# Altium PCB Device.PcbDoc
Units mil, origin at the board's own origin, x right, y up, seen from the top; angles counter-clockwise.
Board outline 1574.8 x 590.55 mil, 4 copper layers (Top Layer, Sub Top Layer, Sub Bottom Layer, Bottom Layer), stack 23.756 mil thick; 66 components, 66 nets, 317 pads, 27 vias.
Unrouted connection lines stored in the file: 85.
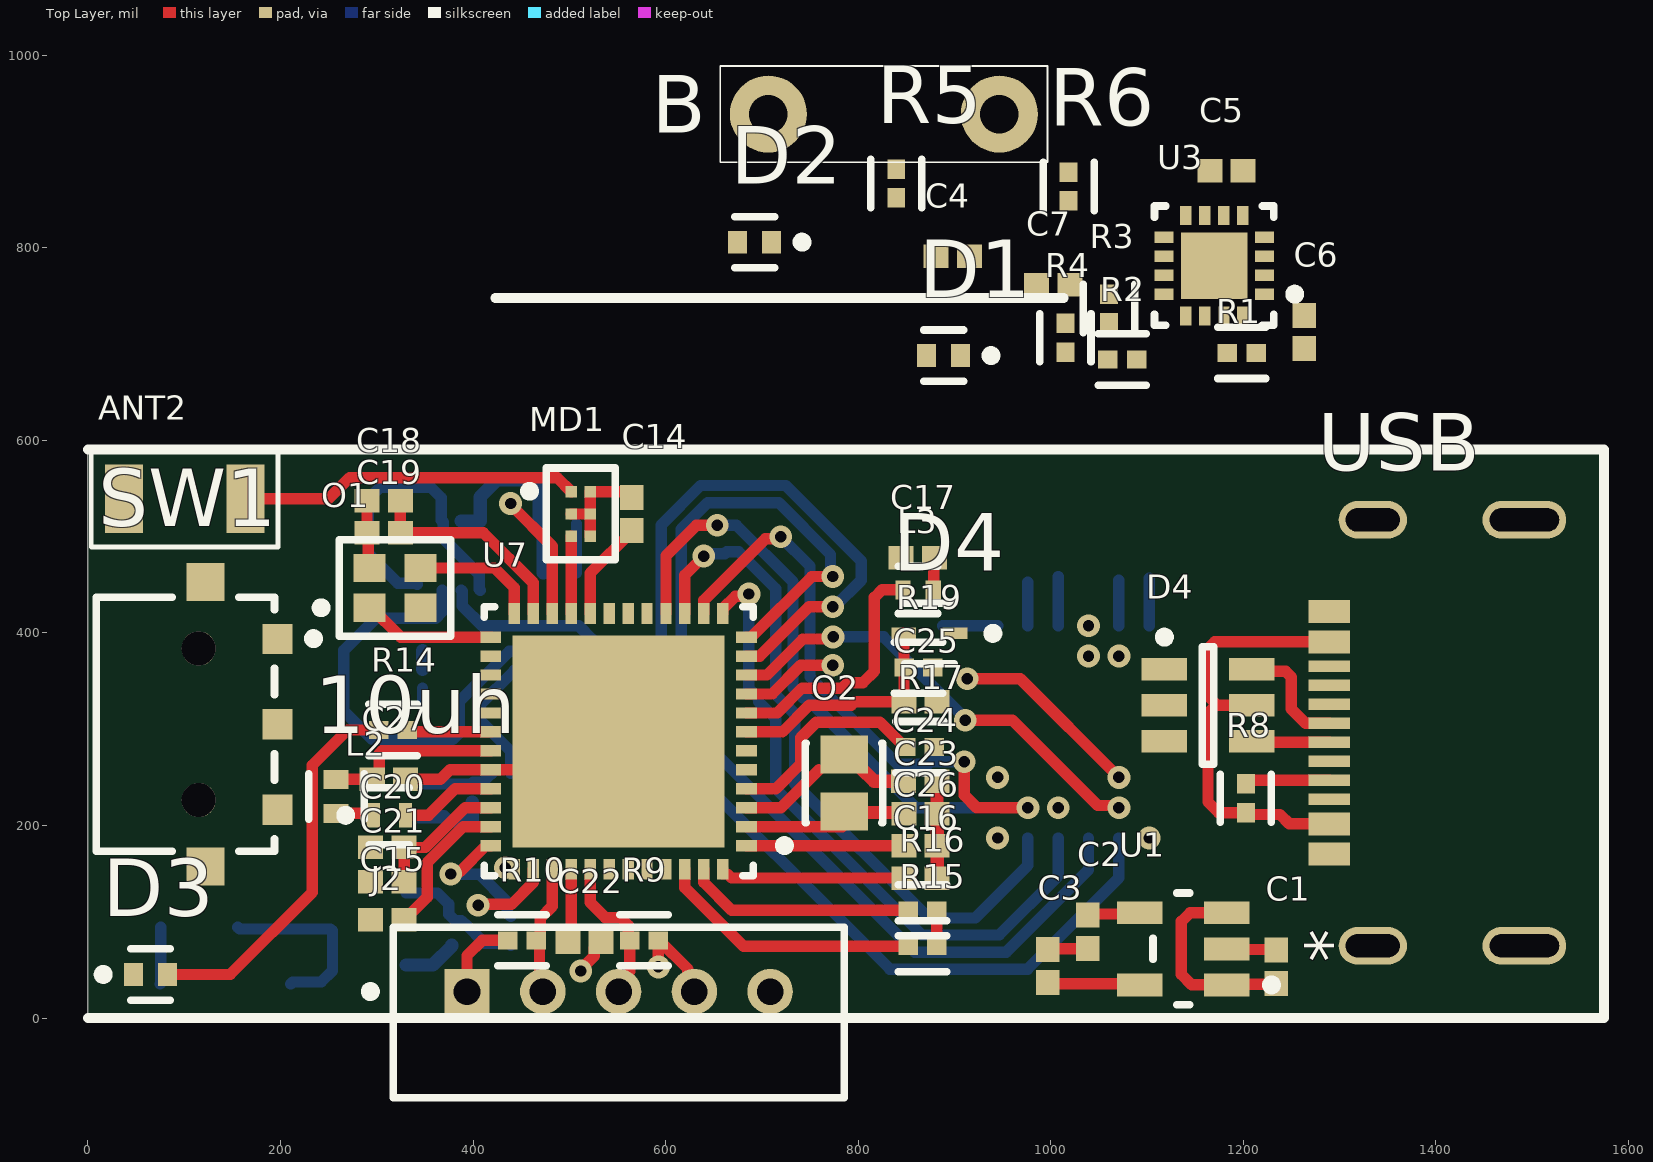
[diagram p0: Top Layer view]
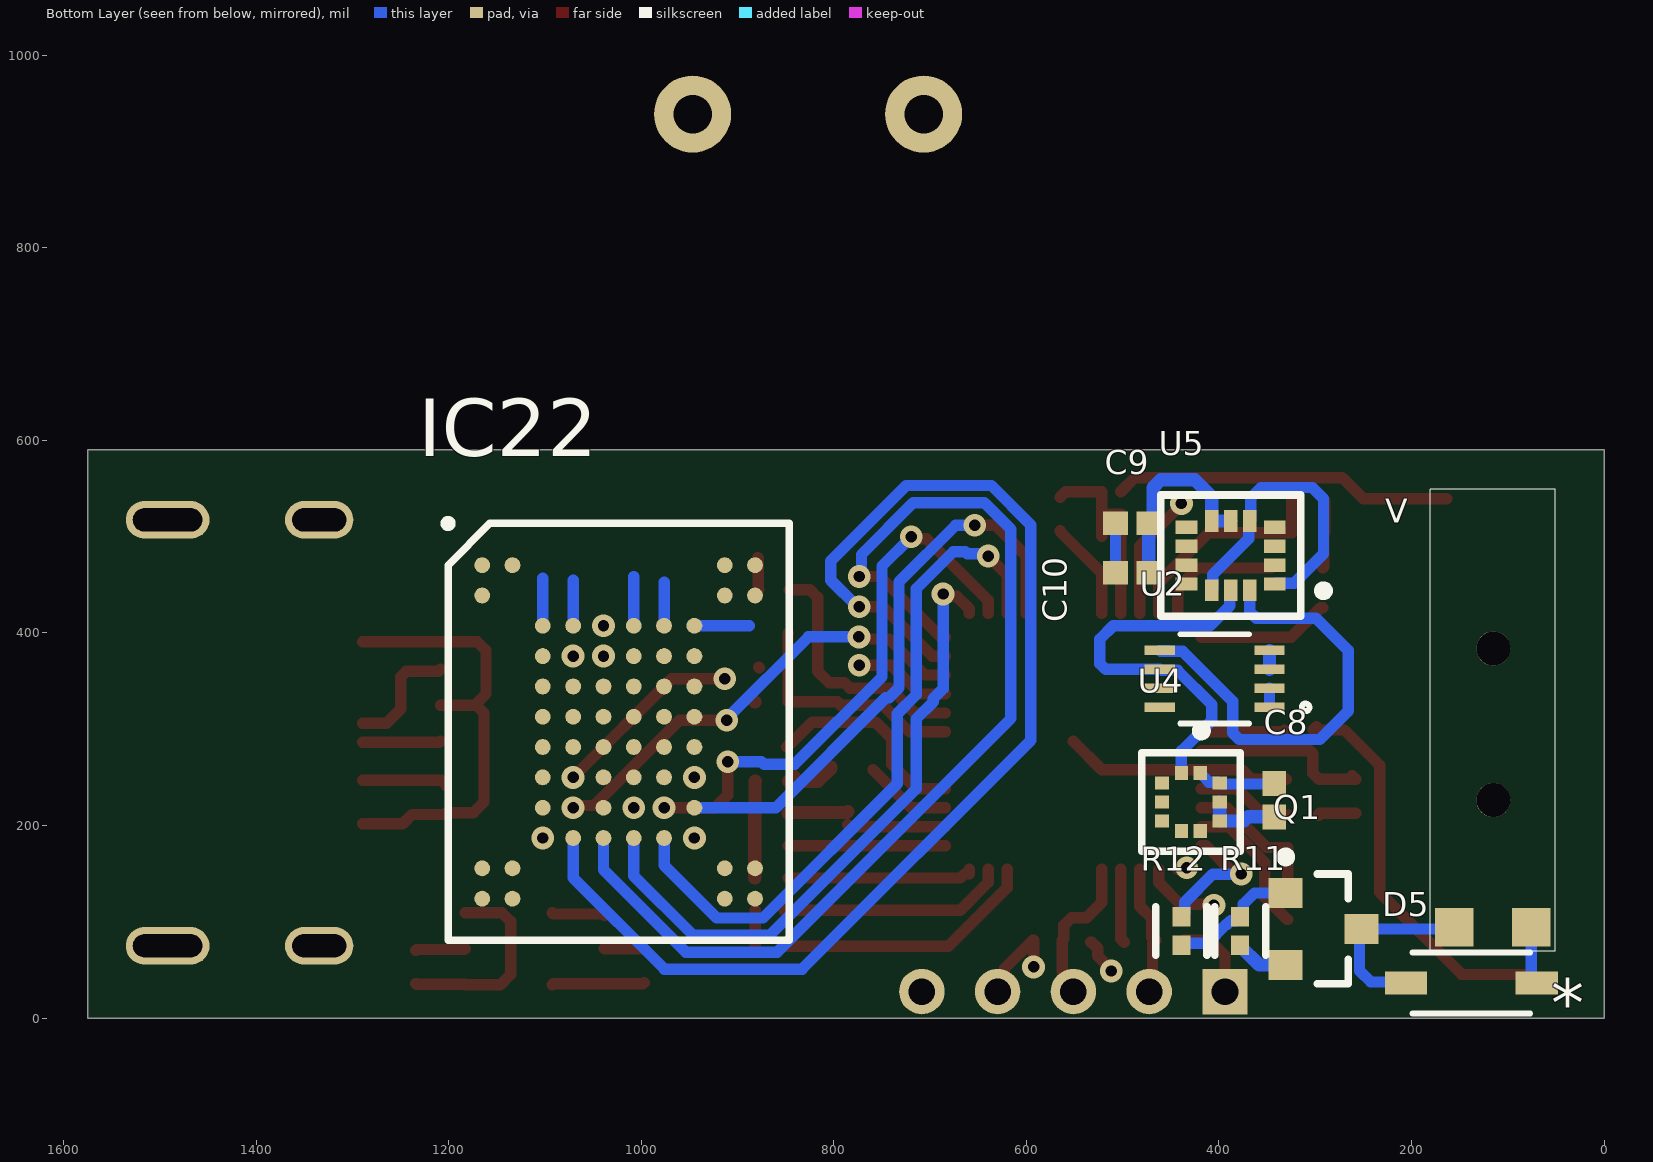
[diagram p1: Bottom Layer view, seen from below]
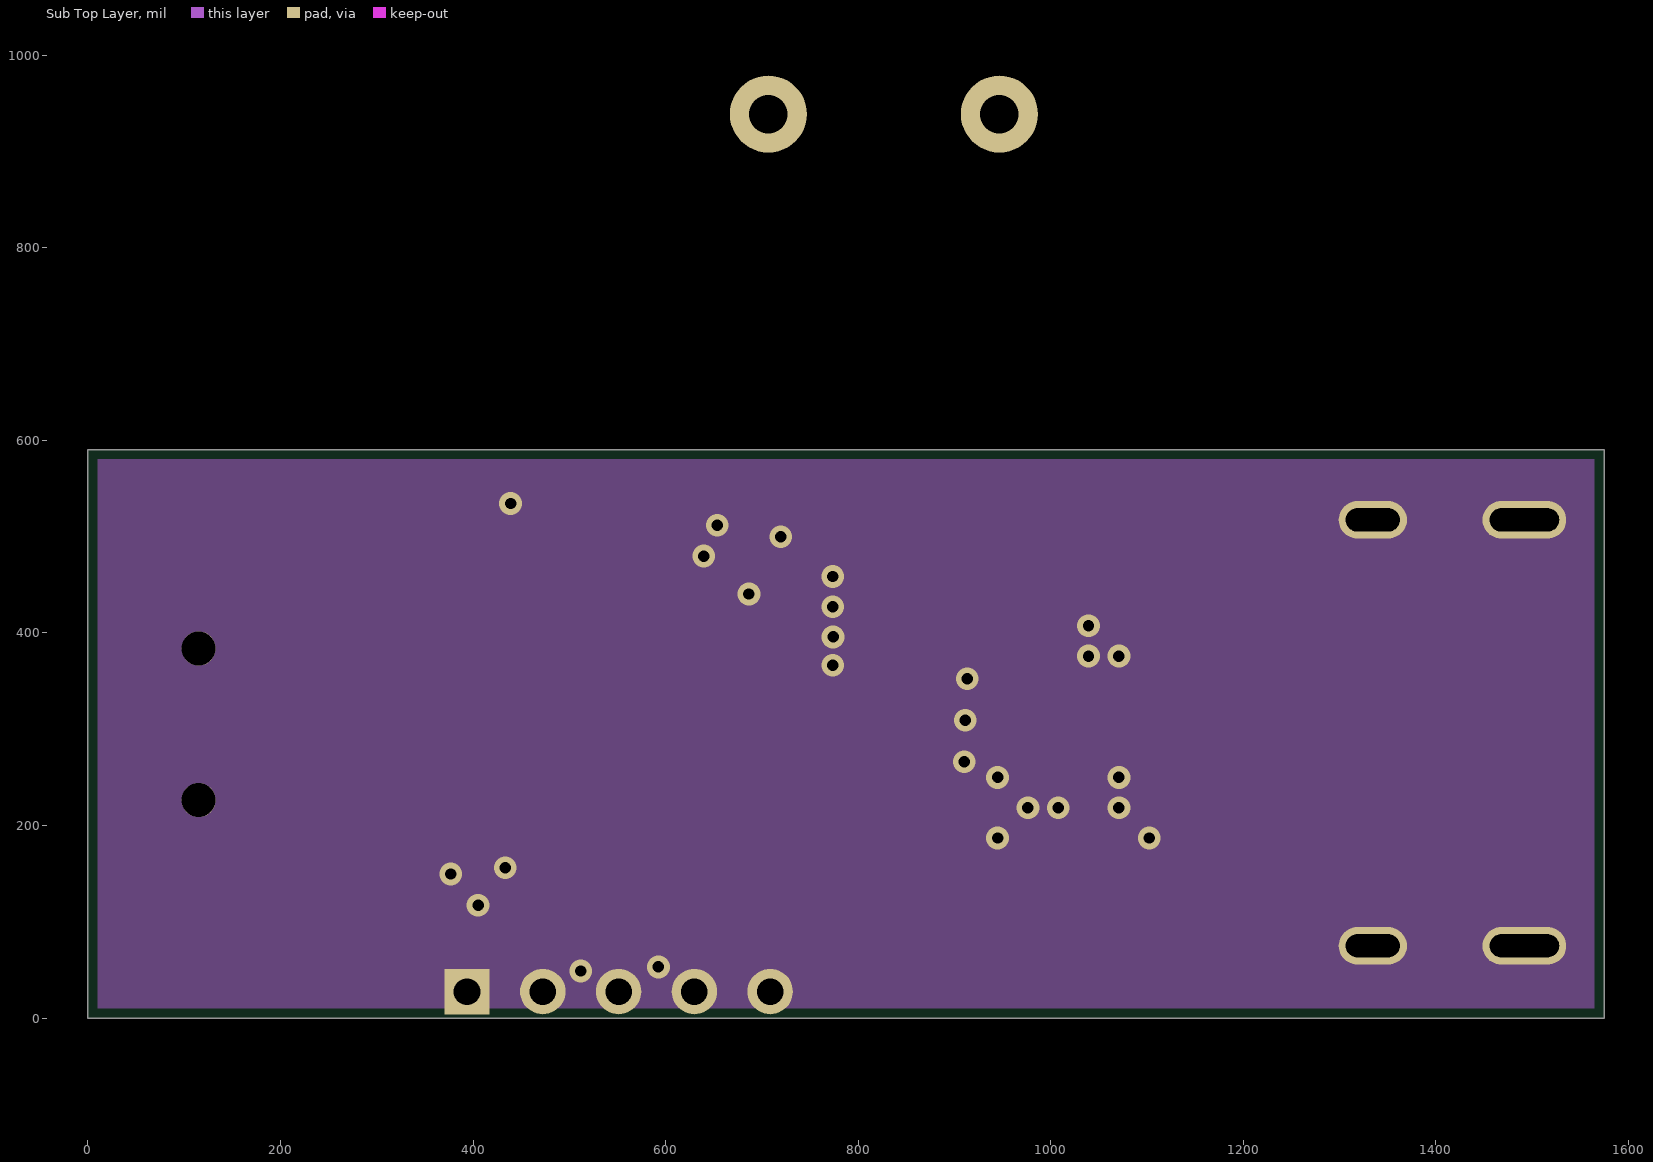
[diagram p2: Sub Top Layer]
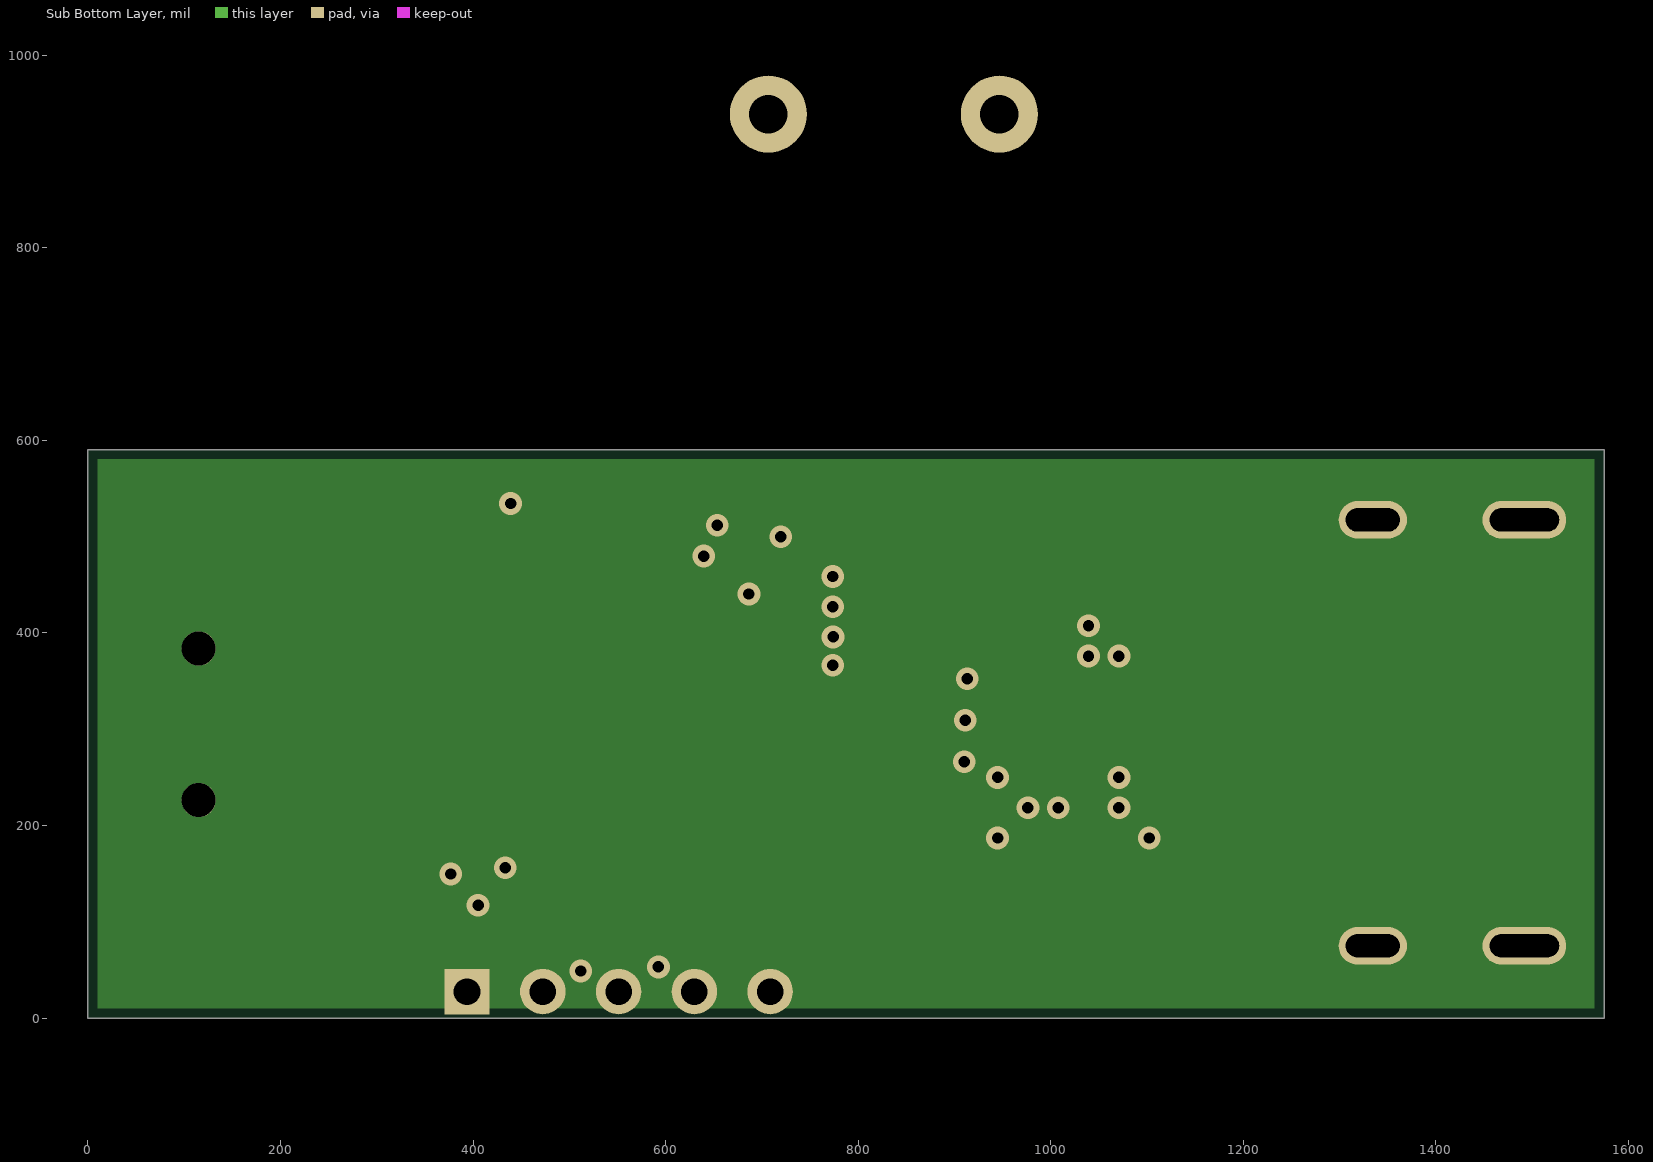
[diagram p3: Sub Bottom Layer]

## Layer stack, top to bottom
Top Solder: solder mask 0.4, Solder Resist, Dk 3.5
Top Layer: signal copper 1.378
Dielectric 2: prepreg 2.8, PP-006, Dk 4.1
Sub Top Layer: signal copper 1.4
Dielectric 1: dielectric 12.6, FR-4, Dk 4.8
Sub Bottom Layer: signal copper 1.4
Dielectric 3: prepreg 2.8, PP-006, Dk 4.1
Bottom Layer: signal copper 1.378
Bottom Solder: solder mask 0.4, Solder Resist, Dk 3.5

## Board outline
0,0 1574.8,0 1574.8,590.55 0,590.55

## Design rules (kind name [scope] priority, off if disabled: settings)
AcuteAngle [All] p1: minimum=3.50000000000000E+0001 checktracksonly=FALSE
BoardOutlineClearance "BoardOutlineClearance 1" [All] p1: gap=9.84 ignorepadtopadclearanceinfootprint=FALSE except(0: Arc-SplitContinuation Track-SplitContinuation SMDPad-SplitContinuation THPad-SplitContinuation Via-SplitContinuation Fill-SplitContinuation Poly-SplitContinuation Region-SplitContinuation Text-SplitContinuation) // Milling
BoardOutlineClearance "BoardOutlineClearance 2" [All] p2: gap=15.75 ignorepadtopadclearanceinfootprint=FALSE except(0: Arc-SplitContinuation Track-SplitContinuation SMDPad-SplitContinuation THPad-SplitContinuation Via-SplitContinuation Fill-SplitContinuation Poly-SplitContinuation Region-SplitContinuation Text-SplitContinuation) // V-Cut
Clearance "Clearance 3 Oz" [All] p1 off: gap=13.78 ignorepadtopadclearanceinfootprint=FALSE except(9.84: Arc-Hole Track-Hole SMDPad-Hole THPad-Hole Via-Hole Fill-Hole Poly-Hole Region-Hole Text-Hole)
Clearance "Clearance 2 Oz" [All] p2 off: gap=11.81 ignorepadtopadclearanceinfootprint=FALSE except(9.84: Arc-Hole Track-Hole SMDPad-Hole THPad-Hole Via-Hole Fill-Hole Poly-Hole Region-Hole Text-Hole)
Clearance "Clearance-1 1 Oz" [All] p3 off: gap=7.87 ignorepadtopadclearanceinfootprint=FALSE except(9.84: Arc-Hole Track-Hole SMDPad-Hole THPad-Hole Via-Hole Fill-Hole Poly-Hole Region-Hole Text-Hole) // Standart
Clearance "Clearance-2 1 Oz" [All] p4: gap=5.91 ignorepadtopadclearanceinfootprint=FALSE except(7.87: Arc-Fill Arc-Poly Track-Fill Track-Poly SMDPad-Fill SMDPad-Poly THPad-Fill THPad-Poly Via-Fill Via-Poly Fill-Fill Fill-Poly Poly-Poly; 9.84: Arc-Hole Track-Hole SMDPad-Hole THPad-Hole Via-Hole Fill-Hole Poly-Hole Region-Hole Text-Hole) // Advance
Clearance "Clearance-1 1/2 Oz" [All] p5 off: gap=4.92 ignorepadtopadclearanceinfootprint=FALSE except(7.87: Arc-Fill Arc-Poly Track-Fill Track-Poly SMDPad-SMDPad SMDPad-Fill SMDPad-Poly THPad-Fill THPad-Poly Via-Fill Via-Poly Fill-Fill Fill-Poly Poly-Poly Poly-Region Poly-Text; 9.84: Arc-Hole Track-Hole SMDPad-Hole THPad-Hole Via-Hole Fill-Hole Poly-Hole Region-Hole Text-Hole) // Standart
Clearance "Clearance-2 1/2 Oz" [All] p6 off: gap=3.94 ignorepadtopadclearanceinfootprint=FALSE except(5.91: Arc-Fill Arc-Poly Track-Fill Track-Poly SMDPad-SMDPad SMDPad-Fill SMDPad-Poly THPad-Fill THPad-Poly Via-Fill Via-Poly Fill-Fill Fill-Poly Poly-Poly Poly-Region Poly-Text; 9.84: Arc-Hole Track-Hole SMDPad-Hole THPad-Hole Via-Hole Fill-Hole Poly-Hole Region-Hole Text-Hole) // Advance
DiffPairsRouting "DiffPairsRouting 1 Oz" [All] p1: maxlimit=10 minlimit=7.87 mostfreqgap=10 toplayer_minwidth=7.87 toplayer_maxwidth=15 toplayer_prefwidth=15 midlayer1_minwidth=7.87 midlayer1_maxwidth=15 midlayer1_prefwidth=15 midlayer2_minwidth=7.87 midlayer2_maxwidth=15 midlayer2_prefwidth=15 bottomlayer_minwidth=7.87 bottomlayer_maxwidth=15 bottomlayer_prefwidth=15 maxuncoupledlength=500
DiffPairsRouting "DiffPairsRouting 1/2 Oz" [All] p2: maxlimit=10 minlimit=3.94 mostfreqgap=10 toplayer_minwidth=3.94 toplayer_maxwidth=15 toplayer_prefwidth=15 midlayer1_minwidth=3.94 midlayer1_maxwidth=15 midlayer1_prefwidth=15 midlayer2_minwidth=3.94 midlayer2_maxwidth=15 midlayer2_prefwidth=15 bottomlayer_minwidth=3.94 bottomlayer_maxwidth=15 bottomlayer_prefwidth=15 maxuncoupledlength=500
HoleSize "Minimum HoleSize" [IsPad] p1: absolutevalues=TRUE maxlimit=232.28 minlimit=23.62 maxpercent=80.000 minpercent=20.000
HoleSize "Minimum HoleSize VIA 1" [IsVia] p2: absolutevalues=TRUE maxlimit=232.28 minlimit=11.81 maxpercent=80.000 minpercent=20.000 // Standart
HoleSize "Minimum HoleSize VIA 2" [IsVia] p3: absolutevalues=TRUE maxlimit=232.28 minlimit=7.87 maxpercent=80.000 minpercent=20.000 // Advance
HoleToHoleClearance Hole2HoleClearance [All] p1: gap=9.84 allowstackedmicrovias=FALSE
MinimumAnnularRing "Minimum AR VIA Standart" [IsVia] p1: minimumring=5.91
MinimumAnnularRing "Minimum AR PAD Standart" [IsPAD] p2: minimumring=7.87
MinimumAnnularRing "Minimum AR VIA Advance" [IsVia] p3: minimumring=3.94
MinimumAnnularRing "Minimum AR PAD Advance" [IsPAD] p4: minimumring=5.91
MinimumSolderMaskSliver "SolderMask Bridge Standart" [All] p1: minsoldermaskwidth=5.91 // All Masks
MinimumSolderMaskSliver "SolderMask Bridge Advance" [All] p2: minsoldermaskwidth=3.94 // Mask LDI
PlaneClearance "PlaneClearance 3 Oz" [All] p1: clearance=13.78
PlaneClearance "PlaneClearance 2 Oz" [All] p2: clearance=11.81
PlaneClearance "PlaneClearance 1 Oz" [All] p3: clearance=7.87
PlaneClearance "PlaneClearance-1 1/2 Oz" [All] p4: clearance=7.87 // Standart
PlaneClearance "PlaneClearance-2 1/2 Oz" [All] p5: clearance=5.91 // Advance
PlaneConnect "TermalConnect 3 Oz" [All] p1: planeconnectstyle=Relief reliefexpansion=7.87 reliefentries=4 reliefconductorwidth=13.78 reliefairgap=13.78 // Standart
PlaneConnect "TermalConnect 2 Oz" [All] p2: planeconnectstyle=Relief reliefexpansion=7.87 reliefentries=4 reliefconductorwidth=11.81 reliefairgap=11.81 // Standart
PlaneConnect "TermalConnect-1 1 Oz" [All] p3: planeconnectstyle=Relief reliefexpansion=7.87 reliefentries=4 reliefconductorwidth=7.87 reliefairgap=7.87 // Standart
PlaneConnect "TermalConnect-2 1 Oz" [All] p4: pad.planeconnectstyle=Relief pad.reliefexpansion=5.91 pad.reliefentries=4 pad.reliefconductorwidth=7.87 pad.reliefairgap=7.87 via.planeconnectstyle=Direct via.reliefexpansion=5.91 via.reliefentries=4 via.reliefconductorwidth=5.91 via.reliefairgap=5.91 // Advance
PlaneConnect "TermalConnect-1 1/2 Oz" [All] p5: planeconnectstyle=Relief reliefexpansion=7.87 reliefentries=4 reliefconductorwidth=7.87 reliefairgap=7.87 // Standart
PlaneConnect "TermalConnect-2 1/2 Oz" [All] p6: pad.planeconnectstyle=Relief pad.reliefexpansion=5.91 pad.reliefentries=4 pad.reliefconductorwidth=5.91 pad.reliefairgap=5.91 via.planeconnectstyle=Direct via.reliefexpansion=5.91 via.reliefentries=4 via.reliefconductorwidth=5.91 via.reliefairgap=5.91 // Advance
PolygonConnect "PolygonConnect 3 Oz" [All] p1: thpad.connectstyle=Relief thpad.reliefconductorwidth=13.78 thpad.reliefentries=4 thpad.polygonreliefangle="90 Angle" thpad.airgapwidth=13.78 smdpad.connectstyle=Relief smdpad.reliefconductorwidth=13.78 smdpad.reliefentries=4 smdpad.polygonreliefangle="90 Angle" smdpad.airgapwidth=13.78 via.connectstyle=Direct via.reliefconductorwidth=10 via.reliefentries=4 via.polygonreliefangle="90 Angle" via.airgapwidth=10
PolygonConnect "PolygonConnect 2 Oz" [All] p2: thpad.connectstyle=Relief thpad.reliefconductorwidth=11.81 thpad.reliefentries=4 thpad.polygonreliefangle="90 Angle" thpad.airgapwidth=11.81 smdpad.connectstyle=Relief smdpad.reliefconductorwidth=11.81 smdpad.reliefentries=4 smdpad.polygonreliefangle="90 Angle" smdpad.airgapwidth=11.81 via.connectstyle=Direct via.reliefconductorwidth=10 via.reliefentries=4 via.polygonreliefangle="90 Angle" via.airgapwidth=10
PolygonConnect "PolygonConnect-1 1 Oz" [All] p3: thpad.connectstyle=Relief thpad.reliefconductorwidth=7.87 thpad.reliefentries=4 thpad.polygonreliefangle="90 Angle" thpad.airgapwidth=7.87 smdpad.connectstyle=Relief smdpad.reliefconductorwidth=7.87 smdpad.reliefentries=4 smdpad.polygonreliefangle="90 Angle" smdpad.airgapwidth=7.87 via.connectstyle=Direct via.reliefconductorwidth=10 via.reliefentries=4 via.polygonreliefangle="90 Angle" via.airgapwidth=10 // Standart
PolygonConnect "PolygonConnect-2 1 Oz" [All] p4: thpad.connectstyle=Relief thpad.reliefconductorwidth=5.91 thpad.reliefentries=4 thpad.polygonreliefangle="90 Angle" thpad.airgapwidth=5.91 smdpad.connectstyle=Relief smdpad.reliefconductorwidth=5.91 smdpad.reliefentries=4 smdpad.polygonreliefangle="90 Angle" smdpad.airgapwidth=5.91 via.connectstyle=Direct via.reliefconductorwidth=10 via.reliefentries=4 via.polygonreliefangle="90 Angle" via.airgapwidth=10 // Advance
PolygonConnect "PolygonConnect-1 1/2 Oz" [All] p5: thpad.connectstyle=Relief thpad.reliefconductorwidth=5.91 thpad.reliefentries=4 thpad.polygonreliefangle="90 Angle" thpad.airgapwidth=7.87 smdpad.connectstyle=Relief smdpad.reliefconductorwidth=7.87 smdpad.reliefentries=4 smdpad.polygonreliefangle="90 Angle" smdpad.airgapwidth=7.87 via.connectstyle=Direct via.reliefconductorwidth=10 via.reliefentries=4 via.polygonreliefangle="90 Angle" via.airgapwidth=10 // Standart
PolygonConnect "PolygonConnect-2 1/2 Oz" [All] p6: thpad.connectstyle=Relief thpad.reliefconductorwidth=4.92 thpad.reliefentries=4 thpad.polygonreliefangle="90 Angle" thpad.airgapwidth=5.91 smdpad.connectstyle=Relief smdpad.reliefconductorwidth=4.92 smdpad.reliefentries=4 smdpad.polygonreliefangle="90 Angle" smdpad.airgapwidth=5.91 via.connectstyle=Direct via.reliefconductorwidth=10 via.reliefentries=4 via.polygonreliefangle="90 Angle" via.airgapwidth=10 // Advance
RoomDefinition U_LD3985M33R [InComponentClass('U_LD3985M33R')] p1: confinementstyle=ConfineIn formatcopy=TRUE lockcomponents=FALSE outline 1329.72,-3.94 1329.72,151.57 955.71,151.57 955.71,-3.94
RoomDefinition U_STM32WB55CGU6 [InComponentClass('U_STM32WB55CGU6')] p2: confinementstyle=ConfineIn formatcopy=TRUE lockcomponents=FALSE outline -19.69,610.24 -19.69,-17.72 1061.02,-17.72 1061.02,610.24
RoomDefinition U_USB [InComponentClass('U_USB')] p3: confinementstyle=ConfineIn formatcopy=TRUE lockcomponents=FALSE outline 1062.99,-17.72 1590.55,-17.72 1590.55,610.24 1062.99,610.24
RoomDefinition U_SWD [InComponentClass('U_SWD')] p4: confinementstyle=ConfineIn formatcopy=TRUE lockcomponents=FALSE outline 340.55,230.32 340.55,-13.78 734.25,-13.78 734.25,230.32
RoomDefinition U_LSM6DSRXTR [InComponentClass('U_LSM6DSRXTR')] p5: confinementstyle=ConfineIn formatcopy=TRUE lockcomponents=FALSE outline 523.62,610.24 309.64,610.24 309.64,408.04 523.62,408.04
RoomDefinition U_LPS22HBTR [InComponentClass('U_LPS22HBTR')] p6: confinementstyle=ConfineIn formatcopy=TRUE lockcomponents=FALSE outline 523.62,163.58 523.62,289.57 309.28,289.57 309.28,163.58
RoomDefinition U_M24512-DFMC6TG [InComponentClass('U_M24512-DFMC6TG')] p7: confinementstyle=ConfineIn formatcopy=TRUE lockcomponents=FALSE outline 523.62,407.48 310.04,407.48 310.04,289.37 523.62,289.37
RoomDefinition U_VIBRO [InComponentClass('U_VIBRO')] p8: confinementstyle=ConfineIn formatcopy=TRUE lockcomponents=FALSE outline -19.69,-14.76 490.16,-14.76 490.16,610.24 -19.69,610.24
RoomDefinition U_L6924D013TR [InComponentClass('U_L6924D013TR')] p9: confinementstyle=ConfineIn formatcopy=TRUE lockcomponents=FALSE outline 1313.58,988.19 662.01,988.19 662.01,614.17 1313.58,614.17
RoutingCorners [All] p1 off: cornerstyle=45-Degree minsetback=100 maxsetback=100
RoutingVias [All] p1: holewidth=11.81 width=23.62 viastyle="Through Hole" minholewidth=7.87 minwidth=15.75 maxholewidth=232.28 maxwidth=251.97
SilkToSilkClearance Silk2SilkClearance [All] p1 off: silktosilkclearance=5.91
SilkToSolderMaskClearance Silk2SolderMaskClearance [IsPad] p1 off: minsilkscreentomaskgap=5.91 clearancetoexposedcopper=TRUE
SolderMaskExpansion SolderMaskExpansion-1 [All] p1: expansion=1.97 istentingtop=FALSE // Standart
SolderMaskExpansion "SolderMaskExpansion LDI" [All] p2: expansion=0.98 istentingtop=FALSE // Advance
UnRoutedNet [All] p1: checkbadconnections=TRUE
Width "Width 3 Oz" [All] p1 off: maxlimit=393.7 minlimit=13.78 preferedwidth=15.75 checkconnectedcopper=TRUE
Width "Width 2 Oz" [All] p2: maxlimit=393.7 minlimit=11.81 preferedwidth=13.78 minimp=50.000000 maximp=50.000000 favimp=50.000000 checkconnectedcopper=TRUE
Width "Width 1 Oz" [All] p3: maxlimit=393.7 minlimit=5.91 preferedwidth=7.87 checkconnectedcopper=TRUE
Width "Width 1/2 Oz" [All] p4: maxlimit=393.7 minlimit=3.94 preferedwidth=4.92 checkconnectedcopper=TRUE
20 further rules are at their usual default settings.

## Classes and differential pairs
component class U_TC58BVG1S3HBAI4: IC22
component class U_VIBRO: D5 Q1 R11 R12 V
component class U_USB: D4 R8 USB
component class U_SWD: J2 R9 R10
component class U_STM32WB55CGU6: 10uh ANT2 C14 C15 C16 C17 C18 C19 C20 C21 C22 C23 C24 C25 C26 C27 D3 D4 L2 L3 MD1 O1 O2 R14 R15 R16 R17 R19 SW1 U7
component class U_M24512-DFMC6TG: U2
component class U_LSM6DSRXTR: C9 C10 U5
component class U_LPS22HBTR: C8 U4
component class U_LD3985M33R: C1 C2 C3 U1
component class U_L6924D013TR: B C4 C5 C6 C7 D1 D2 R1 R2 R3 R4 R5 R6 U3

## Components (designator, comment, footprint, x,y, rotation, side; value= is the part's Value field where it differs from the comment)
10uh "L1" FP-LQW15DN_00-MFG 257.87,230.32 r90 top
ANT2 "KH3216-A55" KH3216-A55 98.43,539.37 r90 top
B "BAT-CON" BAT-CON 826.77,938.98 r0 top
C1 "10 uF" CAPC1005X55X25NL05T10 1234.25,53.15 r270 top
C2 "10 nF" CAPC1005X55X25NL05T10 1038.39,89.57 r90 top
C3 "1 uF" CAPC1005X55X25NL05T10 997.05,54.13 r270 top
C4 "1 uF" CAPC1005X55X25NL05T10 898.23,791.34 r0 top
C5 "330 pF" CAPC1005X55X25NL05T10 1182.68,879.92 r180 top
C6 "1 uF" CAPC1005X55X25NL05T10 1263.39,712.6 r270 top
C7 "1 uF" CAPC1005X55X25NL05T10 1002.56,761.81 r0 top
C8 "4.7 uF" CAPC1005X55X25NL05T10 342.52,226.38 r90 bottom
C9 "100 nF" CAPC1005X55X25NL05T10 490.16,513.78 r0 bottom
C10 "100 nF" CAPC1005X55X25NL05T10 490.16,462.6 r0 bottom
C14 "100 nF" CAPC1005X55X25NL05T10 564.96,523.62 r90 top
C15 "100 nF" CAPC1005X55X25NL05T10 311.02,102.36 r0 top
C16 "100 nF" CAPC1005X55X25NL05T10 864.76,145.47 r0 top
C17 "100 nF" CAPC1005X55X25NL05T10 861.81,478.35 r0 top
C18 "100 nF" CAPC1005X55X25NL05T10 307.09,537.4 r180 top
C19 "100 pF" CAPC1005X55X25NL05T10 307.09,503.94 r0 top
C20 "4.7 uF" CAPC1005X55X25NL05T10 311.02,177.17 r0 top
C21 "100 nF" CAPC1005X55X25NL05T10 311.02,141.73 r180 top
C22 "100 nF" CAPC1005X55X25NL05T10 515.75,78.74 r180 top
C23 "4.3 pF" CAPC1005X55X25NL05T10 864.76,212.4 r0 top
C24 "4.3 pF" CAPC1005X55X25NL05T10 864.37,245.87 r180 top
C25 "100 nF" CAPC1005X55X25NL05T10 864.76,328.54 r180 top
C26 "100 nF" CAPC1005X55X25NL05T10 864.76,178.94 r180 top
C27 "4.7 uF" CAPC1005X55X25NL05T10 312.6,248.03 r0 top
D1 "LED" FP-SML-P11MTT86-MFG 888.79,688.14 r180 top
D2 "LED" FP-SML-P11MTT86-MFG 692.52,805.96 r180 top
D3 "LED" FP-SML-P11MTT86-MFG 64.96,45.28 r0 top
D4 "BAT54KFILM" FP-SOD-523-MFG 874.02,399.61 r180 top value=7pF
D4 "USBLC6-2SC6" STM-SOT23-6L_V 1163.39,324.8 r0 top
D5 "BAT43W-7-F" BAT43W-7-F 135.83,37.4 r0 bottom
IC22 "TC58BVG1S3HBAI4" BGA63C80P10X12_900X1100X100 1023.62,297.24 r180 bottom
J2 "B5B-PH-K-S(LF)(SN)" FP-B5B-PH-K-S_LF_SN-MFG 551.18,5.91 r0 top
L2 "10nh" FP-LQG15WH_02-MFG 312.99,210.63 r0 top
L3 "FBH1005-601Y" FP-BLM15-0_05-MFG 862.2,444.88 r180 top
MD1 "MLPF-WB55-01E3" FP-MLPF-WB55-01E3-MFG 511.81,523.62 r0 top
O1 "NX2016SA-32MHZ" FP-NX2016SA-MFG 318.9,446.85 r0 top
O2 "NX2012SA-32.768K" FP-NX2012SA-MFG 785.43,244.09 r90 top
Q1 "DMG3420U-7" DIOD-SOT23-3_B_V 291.34,92.52 r180 bottom
R1 "130 Kohm" FP-RC1005-IPC_C 1198.43,690.94 r0 top
R2 "3.3 Kohm" FP-RC1005-IPC_C 1074.41,684.06 r180 top
R3 "1 Kohm" FP-RC1005-IPC_C 1060.63,737.2 r270 top
R4 "470 ohm" FP-RC1005-IPC_C 1015.35,706.69 r270 top
R5 "680 Om" FP-RC1005-IPC_C 839.57,866.99 r270 top
R6 "680 Om" FP-RC1005-IPC_C 1018.7,863.89 r270 top
R8 "5.3 Kohm" FP-RC1005-IPC_C 1202.76,228.35 r270 top
R9 "10 Kohm" FP-RC1005-IPC_C 577.62,80.71 r180 top
R10 "10 Kohm" FP-RC1005-IPC_C 450.79,80.71 r0 top
R11 "100 Kohm" FP-RC1005-IPC_C 377.95,90.55 r270 bottom
R12 "100 ohm" FP-RC1005-IPC_C 438.98,90.55 r90 bottom
R14 "0 ohm" FP-RC1005-IPC_C 316.93,299.21 r180 top
R15 "1.8 Kohm" FP-RC1005-IPC_C 866.73,74.61 r0 top
R16 "1.8 Kohm" FP-RC1005-IPC_C 866.73,112.01 r0 top
R17 "10Kohm" FP-RC1005-IPC_C 864.17,281.5 r0 top
R19 "100 Kohm" FP-RC1005-IPC_C 862.8,363.98 r0 top
SW1 "JS102000SAQN" FP-JS102000SAQN-MFG 101.18,305.12 r270 top
U1 "LD3985M33R" FP-SOT23-5L-7049676-MFG 1137.8,71.85 r180 top
U2 "M24512-DFMC6TG" M24512-DFMC6TG 405.51,356.3 r0 bottom
U3 "L6924D013TR" FP-VFQFPN16-7185330-MFG 1169.88,781.5 r180 top
U4 "LPS22HBTR" FP-HLGA-10L-8479831-0 429.13,224.41 r270 bottom
U5 "LSM6DSRXTR" FP-LGA-14L-DM00249496-MFG 387.8,480.32 r0 bottom
U7 "STM32WB55CGU6" FP-STM32WB55CGU6-MFG 551.18,287.4 r180 top
USB "USB4510-03-1-A" USB4510-03-1-A 1444.88,295.28 r90 top
V "VIBRO" VIBRO 115.51,94.49 r0 bottom

## Footprints (in the part's own frame and the unit in brackets; to place one, negate y for a bottom-side part, rotate by r counter-clockwise, add the part's x,y. Pads: shape width x height; smd on the part's side, far side on the other; paste and mask are expansions set on the pad)
BAT43W-7-F [mil]
  rect 43.75x23.65 smd paste+0 mask+0: 1(-65.91,1) 2(69.91,1)
  silkscreen extent -59,-31 63,33
BAT-CON [mil]
  round 80 hole 40: 1(-120,0) 2(120,0)
  silkscreen extent -170,-50 170,50
BGA63C80P10X12_900X1100X100 [mm]
  round 0.418 smd: A1(-3.6,4.4) A2(-2.8,4.4) A9(2.8,4.4) A10(3.6,4.4) B1(-3.6,3.6) B9(2.8,3.6) B10(3.6,3.6) C3(-2,2.8) C4(-1.2,2.8) C5(-0.4,2.8) C6(0.4,2.8) C7(1.2,2.8) C8(2,2.8) D3(-2,2) D4(-1.2,2) D5(-0.4,2) D6(0.4,2) D7(1.2,2) D8(2,2) E3(-2,1.2) E4(-1.2,1.2) E5(-0.4,1.2) E6(0.4,1.2) E7(1.2,1.2) E8(2,1.2) F3(-2,0.4) F4(-1.2,0.4) F5(-0.4,0.4) F6(0.4,0.4) F7(1.2,0.4) F8(2,0.4) G3(-2,-0.4) G4(-1.2,-0.4) G5(-0.4,-0.4) G6(0.4,-0.4) G7(1.2,-0.4) G8(2,-0.4) H3(-2,-1.2) H4(-1.2,-1.2) H5(-0.4,-1.2) H6(0.4,-1.2) H7(1.2,-1.2) H8(2,-1.2) J3(-2,-2) J4(-1.2,-2) J5(-0.4,-2) J6(0.4,-2) J7(1.2,-2) J8(2,-2) K3(-2,-2.8) K4(-1.2,-2.8) K5(-0.4,-2.8) K6(0.4,-2.8) K7(1.2,-2.8) K8(2,-2.8) L1(-3.6,-3.6) L2(-2.8,-3.6) L9(2.8,-3.6) L10(3.6,-3.6) M1(-3.6,-4.4) M2(-2.8,-4.4) M9(2.8,-4.4) M10(3.6,-4.4)
  silkscreen extent -4.6,-5.5 4.5,5.6, body extent -4.5,-5.5 4.5,5.5, height 1
CAPC1005X55X25NL05T10 [mm] "Chip Capacitor, 2-Leads, Body 1.00x0.50mm, IPC Medium Density"
  rect 0.66x0.62 smd: 1(-0.44,0) 2(0.44,0)
  body extent -0.53,-0.28 0.53,0.27, height 0.55
DIOD-SOT23-3_B_V [mm] "SOT23, 3-Leads, Body 2.9x1.3mm, Pitch 0.95mm"
  rect 0.9x0.8 smd: 1(-1,0.95) 2(-1,-0.95) 3(1,0)
  silkscreen extent -1.13,-1.45 0.65,2.02, body extent -0.65,-1.45 0.65,1.45, height 1.17
FP-B5B-PH-K-S_LF_SN-MFG [mm]
  rect 1.2x1.2 hole 0.7 paste-2539.97 mask+0: 1(-4,0.55)
  round 1.2 hole 0.7 paste-2539.97 mask+0: 2(-2,0.55) 3(0,0.55) 4(2,0.55) 5(4,0.55)
  silkscreen extent -6.67,-2.25 5.95,2.25, body extent -6.05,-2.35 6.05,2.35, height 0.25
FP-BLM15-0_05-MFG [mm]
  rect 0.4x0.5 smd paste+0 mask+0: 1(-0.4,0) 2(0.4,0)
  silkscreen extent -0.53,-0.63 0.52,0.63, body extent -0.7,-0.38 0.7,0.38, height 0.25
FP-HLGA-10L-8479831-0 [mm]
  rect 0.375x0.35 smd paste+0 mask+0: 1(-0.763,0.25) 2(-0.763,-0.25) 6(0.763,-0.25) 7(0.763,0.25)
  rect 0.35x0.375 smd paste+0 mask+0: 3(-0.5,-0.763) 4(0,-0.763) 5(0.5,-0.763) 8(0.5,0.763) 9(0,0.763) 10(-0.5,0.763)
  silkscreen extent -2,-1.3 1.3,1.3, body extent -1,-1 1,1, height 0.8
FP-JS102000SAQN-MFG [mm]
  rect 0.8x0.8 smd paste+0 mask+0: 1(-2.25,2.43) 2(0,2.43) 3(2.25,2.43)
  rect 1x1 smd paste+0 mask+0: 4(-3.75,0.53) 5(3.75,0.53)
  round 0.9 hole 0.9 unplated paste-2539.97 mask+0: ""(-2,0.35) ""(2,0.35)
  silkscreen extent -3.35,-2.35 3.35,3.51, body extent -4.35,-2.45 4.35,2.93, height 0.25
FP-LGA-14L-DM00249496-MFG [mm]
  rect 0.575x0.35 smd paste-1000 mask+0: 1(-1.162,0.75) 2(-1.162,0.25) 3(-1.162,-0.25) 4(-1.162,-0.75) 8(1.162,-0.75) 9(1.162,-0.25) 10(1.162,0.25) 11(1.162,0.75)
  rect 0.35x0.575 smd paste-1000 mask+0: 5(-0.5,-0.913) 6(0,-0.913) 7(0.5,-0.913) 12(0.5,0.913) 13(0,0.913) 14(-0.5,0.913)
  silkscreen extent -2.57,-1.6 1.85,1.6, body extent -1.5,-1.25 1.5,1.25, height 0.86
FP-LQG15WH_02-MFG [mm]
  rect 0.35x0.65 smd paste+0 mask+0: 1(-0.425,0) 2(0.425,0)
  silkscreen extent -1.27,-0.78 0.53,0.72, body extent -0.7,-0.43 0.7,0.43, height 0.25
FP-LQW15DN_00-MFG [mm]
  rect 0.5x0.66 smd paste+0 mask+0: 1(-0.45,0) 2(0.45,0)
  silkscreen extent -0.6,-0.74 0.6,0.72, body extent -0.8,-0.48 0.8,0.48, height 0.25
FP-MLPF-WB55-01E3-MFG [mm]
  rect 0.3x0.3 smd paste-1000 mask-1000: A1(-0.25,0.587) A2(-0.25,0) A3(-0.25,-0.587) B1(0.25,0.587) B2(0.25,0) B3(0.25,-0.587)
  silkscreen extent -1.47,-1.21 0.91,1.21, body extent -1.01,-1.31 1.01,1.31, height 0.25
FP-NX2012SA-MFG [mm]
  rect 1x1.25 smd paste+0 mask+0: 1(-0.75,0) 2(0.75,0)
  silkscreen extent -1.05,-1.02 1.05,1.02, body extent -1.35,-0.72 1.35,0.72, height 0.25
FP-NX2016SA-MFG [mm]
  rect 0.85x0.75 smd paste+0 mask+0: 1(-0.675,-0.525) 2(0.675,-0.525) 3(0.675,0.525) 4(-0.675,0.525)
  silkscreen extent -2.07,-1.28 1.48,1.28, body extent -1.2,-1 1.2,1, height 0.25
FP-RC1005-IPC_C [mil]
  rect 20.29x18.6 smd paste+0 mask+0: 1(-14.9,0) 2(14.9,0)
  silkscreen extent -25,-27 25,27, body extent -29,-15 29,15, height 10
FP-SML-P11MTT86-MFG [mm]
  rect 0.5x0.6 smd paste+0 mask+0: 1(-0.45,0) 2(0.45,0)
  silkscreen extent -1.38,-0.67 0.53,0.67, body extent -0.8,-0.43 0.8,0.43, height 0.25
FP-SOD-523-MFG [mm]
  rect 0.65x0.3 smd paste+0 mask+0: 1(-0.675,0) 2(0.675,0)
  silkscreen extent -1.8,-0.8 0.65,0.8, body extent -1.1,-0.55 1.1,0.55, height 0.25
FP-SOT23-5L-7049676-MFG [mm]
  rect 1.2x0.6 smd paste+0 mask+0: 1(-1.15,0.95) 2(-1.15,0) 3(-1.15,-0.95) 4(1.15,-0.95) 5(1.15,0.95)
  silkscreen extent -2.45,-1.48 0.8,1.47, body extent -1.85,-1.58 1.85,1.57, height 0.25
FP-STM32WB55CGU6-MFG [mm]
  rect 0.55x0.3 smd paste+0 mask+0: 1(-3.375,2.75) 2(-3.375,2.25) 3(-3.375,1.75) 4(-3.375,1.25) 5(-3.375,0.75) 6(-3.375,0.25) 7(-3.375,-0.25) 8(-3.375,-0.75) 9(-3.375,-1.25) 10(-3.375,-1.75) 11(-3.375,-2.25) 12(-3.375,-2.75) 25(3.375,-2.75) 26(3.375,-2.25) 27(3.375,-1.75) 28(3.375,-1.25) 29(3.375,-0.75) 30(3.375,-0.25) 31(3.375,0.25) 32(3.375,0.75) 33(3.375,1.25) 34(3.375,1.75) 35(3.375,2.25) 36(3.375,2.75)
  rect 0.3x0.55 smd paste+0 mask+0: 13(-2.75,-3.375) 14(-2.25,-3.375) 15(-1.75,-3.375) 16(-1.25,-3.375) 17(-0.75,-3.375) 18(-0.25,-3.375) 19(0.25,-3.375) 20(0.75,-3.375) 21(1.25,-3.375) 22(1.75,-3.375) 23(2.25,-3.375) 24(2.75,-3.375) 37(2.75,3.375) 38(2.25,3.375) 39(1.75,3.375) 40(1.25,3.375) 41(0.75,3.375) 42(0.25,3.375) 43(-0.25,3.375) 44(-0.75,3.375) 45(-1.25,3.375) 46(-1.75,3.375) 47(-2.25,3.375) 48(-2.75,3.375)
  rect 5.6x5.6 smd paste+0 mask+0: 49(0,0)
  silkscreen extent -4.5,-3.55 3.55,3.55, body extent -3.75,-3.75 3.75,3.75, height 0.25
FP-VFQFPN16-7185330-MFG [mm]
  rect 0.5x0.3 smd paste+0 mask+0: 1(-1.325,0.75) 2(-1.325,0.25) 3(-1.325,-0.25) 4(-1.325,-0.75) 9(1.325,-0.75) 10(1.325,-0.25) 11(1.325,0.25) 12(1.325,0.75)
  rect 0.3x0.5 smd paste+0 mask+0: 5(-0.75,-1.325) 6(-0.25,-1.325) 7(0.25,-1.325) 8(0.75,-1.325) 13(0.75,1.325) 14(0.25,1.325) 15(-0.25,1.325) 16(-0.75,1.325)
  rect 1.75x1.75 smd paste+0 mask+0: 17(0,0)
  silkscreen extent -2.25,-1.58 1.58,1.58, body extent -1.68,-1.68 1.68,1.68, height 0.25
KH3216-A55 [mm]
  rect 1.8x1 smd: 1(0,-1.651) 2(0,1.549)
  silkscreen extent -1.27,-2.51 1.27,2.41
M24512-DFMC6TG [mil]
  rect 31.51x9.83 smd paste+0 mask+0: 1(-58.06,33.55) 2(-58.06,13.85) 3(-58.06,-5.85) 4(-58.06,-25.55) 5(56.06,-25.55) 6(56.06,-5.85) 7(56.06,13.85) 8(56.06,33.55)
  silkscreen extent -99,-42 35,50
STM-SOT23-6L_V [mm] "SOT23, 6-Leads, Body 3.05x1.75mm, Pitch 0.95mm"
  rect 1.2x0.6 smd: 1(-1.15,0.95) 2(-1.15,0) 3(-1.15,-0.95) 4(1.15,-0.95) 5(1.15,0) 6(1.15,0.95)
  silkscreen extent -1.27,-1.55 0.15,1.92, body extent -1.6,-1.53 1.6,1.53, height 1.45
USB4510-03-1-A [mil]
  rect 24x43 smd paste+0 mask+0: A1-B12(-125,155.5) A4-B9(-93.5,155.5) B1-A12(127,155.5) B4-A9(95.5,155.5)
  rect 12x43 smd paste+0 mask+0: A5(-48.2,155.5) A6(-8.8,155.5) A7(10.9,155.5) A8(50.3,155.5) B5(70,155.5) B6(30.6,155.5) B7(-28.5,155.5) B8(-68,155.5)
  oval 39x87 hole 24 slot 72 at 90 deg: GND(-220.25,-47.2) GND(222.25,-47.2)
  oval 39x71 hole 24 slot 56 at 90 deg: GND(-220.25,110.25) GND(222.25,110.25)
VIBRO [mil]
  rect 40x40 smd mask+1: 1(40,0) 2(-40,0)
  silkscreen extent -65,-455 65,25

## Part data
10uh: library part CMP-06042-016523-1, "FIXED IND 10UH 120MA 5.405OHM", RoHS Compliant=Yes
C1 C2 C3 C4 C5 C6 C7 C8 C9 C10 C14 C15 C16 C17 C18 C19 C20 C21 C22 C23 C24 C25 C26 C27: library part CMP-2008-04515-1, Manufacturer=Murata, Part Number=GRM155F50J684ZE01D
D1 D2 D3: library part CMP-2000-07126-2, "LED YELLOW/GREEN CLEAR 1006 SMD", Case Code (Imperial)=0402, Case Code (Metric)=1005, Color=Green, Forward Current=20mA, Forward Voltage=1.9V, Lens Color=Colorless, Max Operating Temperature=85°C, Min Operating Temperature=-40°C, Package Quantity=1, Power Rating=54mW, Test Current=1mA, Case/Package=0402, Dominant Wavelength=569nm, Height=0.25mm, Illumination Color=Green, Lead Free="Lead Free", Length=1mm, Lens Style=Diffused, Lens Transparency=Clear, Luminous Intensity=2.1mcd, Mount="Surface Mount", Number of LEDs=1, Number of Pins=2, Packaging="Tape and Reel", Radiation Hardening=No, REACH SVHC="No SVHC", RoHS Compliant=Yes, Series=PicoLED™, Viewing Angle=150°, Wavelength=569nm, Width=0.6mm
D4: library part CMP-12187-000026-1, "DIODE SCHOTTKY 40V 300MA SOD523", Capacitance=7pF, Forward Current=300mA, Manufacturer=STMicroelectronics, Max Junction Temp=+150°C, Max Repetitive Reverse Voltage=40V, Max Surge Forward Current=1.25A, Package=SOD-523, Peak Reverse Current=1uA, Temperature="-40°C to +150°C", Temperature Range Low=-40°C, Automotive=No, Category=Diode, ComponentLink2Description=Datasheet, ComponentLink2URL=https://www.st.com/content/ccc/resource/technical/document/datasheet/07/50/54/f2/0d/ba/4a/79/CD00001322.pdf/files/CD00001322.pdf/jcr:content/translations/en.CD00001322.pdf, Device Class L1="Discrete Semiconductors", Device Class L2=Diodes, Device Class L3="Schottky Diodes", Digikey Description="DIODE SCHOTTKY 40V 300MA SOD523", Height=0.7mm, Lead Free=Yes, Manufacturer Part Number=BAT54KFILM, Mouser Description="Schottky Diodes & Rectifiers schottky diode", Octopart=https://octopart.com/bat54kfilm-stmicroelectronics-39618022, RoHS=TRUE, Temperature Range High=+150°C
D4: library part CMP-2000-05378-1, "Very low capacitance ESD protection, 3.5 pF, -40 to 125 degC, 6-Pin SOT23, RoHS, Tape and Reel", Capacitance Value=3.5pF, Clamping Voltage=17V, Leakage Current=0.15uA, Manufacturer=STMicroelectronics, Operating Temp Range=-40Cto125C, Operating Temperature Classification=Automotive, Operating Temperature Max Deg. C=125C, Operating Temperature Min Deg. C=-40C, Package / Case=SOT-23, Package Description="6-Pin Small Outline Transistor, Body 2.925 x 1.625 mm, Pitch 0.95 mm", Package Reference=SOT23-6L, Peak Pulse Current=5A, Reverse Breakdown Voltage=6V, Reverse Stand-off Voltage=5V, Test Current (It)=1mA, Clamping Voltage (Max)=17V, Configuration=Dual, Datasheet URL=http://www.st.com/st-web-ui/static/active/en/resource/technical/document/datasheet/CD00050750.pdf, Datasheet Version="Rev. 5, 10/2011", Direction Type=Uni-Directional, Leakage Current (Max)=0.15uA, Manufacturer URL=http://www.st.com/, Mounting=SurfaceMount, Mounting Style=SurfaceMount, Number of Elements=1, Packaging=TapeandReel, Pin Count=6, Polarity=Uni-Directional, Product Depth (mm)=1.75mm, Product Height (mm)=1.3mm, Product Length (mm)=3.05mm, Rad Hardened=No, Suppressor Type=DiodeArrays, Working Voltage=5V, Working Voltage (Max)=5V
IC22: "Integrated Circuit", Manufacturer_Name=Toshiba, Mouser Part Number=757-TC58BVG1S3HBAI4, Datasheet Link=https://media.digikey.com/pdf/Data%20Sheets/Toshiba%20PDFs/KIOXIA_TC58BVG1S3HBAI4_REV2.00_E20191001C.pdf, Height=1mm, Manufacturer_Part_Number=TC58BVG1S3HBAI4, Mouser Price/Stock=https://www.mouser.com/Search/Refine.aspx?Keyword=757-TC58BVG1S3HBAI4
J2: library part CMP-2000-05908-2, "CONN HEADER VERT 5POS 2MM", Color=Natural, Contact Resistance=20mR, Current Rating=2A, Flammability Rating="UL94 V-0", Housing Color=White, Insulation Resistance=1MR, Max Operating Temperature=85°C, Max Voltage Rating (AC)=100V, Min Operating Temperature=-25°C, Connector Type=Header, Contact Finish - Mating=TIN, Contact Material=Brass, Contact Mating Length=0.13inch, Contact Plating=Tin, Contact Shape=Square, Contact Type="Male Pin", Depth=4.5mm, Fastening Type=Detent, Gender=Male, Height=9.4mm, Housing Material=Polyamide, Insulation Color=Natural, Insulation Material=Nylon, Lead Free="Lead Free", Lead Pitch=2mm, Length=11.9mm, Mated Stacking Heights=8mm, Material=Polyamide, Max Current Rating=2A, Mount="Through Hole", Number of Contacts=5, Number of Pins=5, Number of Poles=5, Number of Positions=5, Number of Rows=1, Orientation=Straight, Packaging=Bulk, Pitch=2mm, REACH SVHC="No SVHC", Series=PH, Termination=Solder, Voltage Rating=100V, Voltage Rating (AC)=100V, Width=4.5mm, Working Voltage=100V
L2: library part CMP-06042-005237-1, "Multilayer type Inductor for Automotive 10nH ±5% 0.19Ω 500mA 0402", Case Code (Imperial)=0402, Case Code (Metric)=1005, Current Rating=500mA, DC Resistance (DCR)=190mR, Inductance=10nH, Max Operating Temperature=125°C, Min Operating Temperature=-55°C, Ratings=AEC-Q200, Self Resonant Frequency=3.3GHz, Test Frequency=100MHz, Tolerance=5%, Case/Package=0402, Core Material=Air, Mount="Surface Mount", Packaging="Cut Tape", Shielding=Unshielded
L3: library part CMP-0686-00187-4, "Chip Ferrite Bead, 0402, 600Ω @ 100MHz, 0.52Ω, 25%, 300mA", Case Code (Imperial)=0402, Case Code (Metric)=1005, Current Rating=300mA, DC Resistance (DCR)=520mR, DC Resistance-Max=600mR, Frequency=100MHz, Max Operating Temperature=125°C, Min Operating Temperature=-55°C, Package Quantity=10000, Tolerance=25%, Case/Package=0402, Core Material=Ferrite, DC Current=300mA, Depth=0.55mm, Height=0.5mm, Impedance=600R, Lead Free="Lead Free", Length=1mm, Material=Steel, Max Current Rating=300mA, Max DC Current=300mA, Military Standard=Not, Number of Circuits=1, Number of Lines=1, Number of Pins=2, Packaging="Tape and Reel", Radiation Hardening=No, REACH SVHC="No SVHC", RoHS Compliant=Yes, Series=BLM15AG_SN, Shielding=Unshielded, Termination=SMD/SMT, Test Frequency=100MHz, Width=0.5mm
MD1: library part CMP-12074-000002-1, "RF FILTER LOW PASS 2.45GHZ 6SMD"
O1: library part CMP-200220-000017-1, "CRYSTAL 32.0000MHZ 8PF SMD", Case/Package=SMD/SMT, ESR (Equivalent Series Resistance)=60R, Frequency=32MHz, Load Capacitance=8pF, Max Operating Temperature=125°C, Min Operating Temperature=-40°C, Ratings=AEC-Q200, Mount="Surface Mount", Packaging="Tape and Reel"
O2: library part CMP-200220-000019-1, "CRYSTAL 32.7680KHZ 12.5PF SMD", Case/Package=SMD/SMT, ESR (Equivalent Series Resistance)=80kR, Frequency=32.768kHz, Frequency Tolerance=20ppm, Load Capacitance=12.5pF, Max Operating Temperature=85°C, Min Operating Temperature=-40°C, Height=0.024inch, Length=0.081inch, Mount="Surface Mount", Packaging="Cut Tape", RoHS Compliant=Yes, Series=NX2012SA, Width=0.047inch
Q1: library part CMP-2000-06172-1, "N-Channel Enhancement Mode MOSFET, 20 V, -55 to 150 degC, 3-Pin SOT23, RoHS, Tape and Reel", Drain-Source On Resistance-Max=29mO, Drain-to-Source Voltage [Vdss]=20V, Manufacturer="Diodes Inc", Package Description="3-Pin Small Outline Transistor, Body 2.9 x 1.3 mm, Pitch 0.96 mm", Package Reference=SOT23-3, Rated Power Dissipation=740mW, Channel Type=N-Channel, Datasheet URL=http://www.diodes.com/_files/datasheets/ds31867.pdf, Datasheet Version="Rev. 5-2, 09/2013", Manufacturer URL=http://www.diodes.com/, Mounting Technology=SurfaceMount, Qg Gate Charge=5.4nC
R1 R2 R3 R4 R5 R6 R8 R9 R10 R11 R12 R14 R15 R16 R17 R19: library part CMP-13261-000953-1, "Res Thick Film 0402 1.87kΩ 1% 0.063W ±100ppm/°C Molded SMD T/R", Case Code (Imperial)=0402, Case Code (Metric)=1005, Max Operating Temperature=155°C, Max Power Dissipation=63mW, Min Operating Temperature=-55°C, Package Quantity=1, Resistance=1.87kR, Temperature Coefficient=100ppm/°C, Tolerance=1%, Voltage Rating (DC)=50V, Case/Package=0402, Composition="Thick Film", Contact Plating=Tin, Depth=0.5mm, Features="Moisture Resistant", Height=0.016inch, Lead Free="Lead Free", Length=1mm, Military Standard=Not, Number of Terminations=2, Packaging="Tape and Reel", Power Rating=63mW, Radiation Hardening=No, Width=0.02inch
SW1: library part CMP-10038-000025-1, "SWITCH SLIDE SPDT 1MA 5V", Actuator Color=Black, Case/Package=SMD/SMT, Contact Current Rating=1mA, Contact Resistance=70mR, Flammability Rating="UL94 V-2", Max Operating Temperature=85°C, Max Voltage Rating (DC)=5V, Min Operating Temperature=-20°C, Package Quantity=1, Actuator Length=1.5mm, Actuator Material=Nylon, Actuator Type=Standard, Contact Material="Copper Alloy", Contact Plating=Silver, Current Rating=1mA, Depth=4.82mm, Electrical Life=15000Cycles, Housing Material=Nylon, Length=7.8mm, Max Current Rating=1mA, Mount="Surface Mount", Orientation="Right Angle", Packaging="Tape and Reel", Radiation Hardening=No, REACH SVHC="No SVHC", RoHS Compliant=Yes, Series=JS, Switch Function=On-On, Switch Travel=1.5mm, Termination="Gull Wing", Throw Configuration=SPDT, Voltage Rating (DC)=5V
U1: library part CMP-0244-00328-2, "IC REG LINEAR 3.3V 150MA SOT23-5", Case/Package=SOT-23, Dropout Voltage=60mV, Input Bias Current=85uA, Max Input Voltage=6V, Max Operating Temperature=125°C, Max Output Current=150mA, Min Current Limit=300mA, Min Input Voltage=2.5V, Min Operating Temperature=-40°C, Min Output Voltage=3.3V, Output Voltage Accuracy=2%, Package Quantity=1, Quiescent Current=150uA, Accuracy=2%, Height=1.3mm, Lead Free="Lead Free", Length=3mm, Mount="Surface Mount", Number of Outputs=1, Number of Pins=5, Number of Regulators=1, Output Current=150mA, Output Type=Fixed, Output Voltage=3.3V, Packaging="Tape and Reel", Polarity=Positive, Radiation Hardening=No, Width=1.75mm
U3: library part CMP-12147-000005-1, "IC BATT CHRGR ION/POLY 16-VFQFPN", Manufacturer=STMicroelectronics, Max Junction Temp=+125°C, Max Power Dissipation=0.67W, Max Supply Voltage=12V, Min Supply Voltage=2.5V, Nominal Supply Current=1.8mA, Output Current=975mA, Output Voltage=4.2V, Package=VFQFPN16-7185330, Temperature="-40°C to +125°C", Temperature Range Low=-40°C, Automotive=No, Category=IC, ComponentLink2Description=Datasheet, ComponentLink2URL=https://www.st.com/resource/en/datasheet/l6924d.pdf, Device Class L1="Integrated Circuits (ICs)", Device Class L2="Power Management ICs", Device Class L3="Battery Management", Digikey Description="IC BATT CHRGR ION/POLY 16-VFQFPN", Footprint Url=https://www.st.com/resource/en/datasheet/l6738.pdf, Height=1mm, Ipc Land Pattern Name=QFN50P300X300X90-16, Lead Free=Yes, Manufacturer Part Number=L6924D013TR, Mouser Description="Battery Management Battery Charger Sys Li-Ion/Li-Poly", Number Of Cells=1, Number of Outputs=1, Octopart=https://octopart.com/l6924d013tr-stmicroelectronics-421996, RoHS=TRUE, Standoff Height=0.02mm, Temperature Range High=+125°C
U4: library part CMP-12182-000004-1, "MEMS NANO PRESSURE SENSOR: 260-1", Manufacturer=STMicroelectronics, Max Supply Voltage=3.6V, Min Supply Voltage=1.7V, Operating Supply Current=3-12uA, Package=HLGA-10L-8479831, Temperature="-40°C to +85°C", Temperature Range High=+85°C, Temperature Range Low=-40°C, Automotive=No, Category=IC, ComponentLink2Description=Datasheet, ComponentLink2URL=https://www.st.com/resource/en/datasheet/lps22hb.pdf, Device Class L1=Sensors, Device Class L2="Pressure Sensors", Device Class L3=unset, Digikey Description="MEMS NANO PRESSURE SENSOR: 260-1", Footprint Url=https://www.st.com/content/ccc/resource/technical/document/technical_note/73/17/9c/16/dd/96/4a/01/CD00134799.pdf/files/CD00134799.pdf/jcr:content/translations/en.CD00134799.pdf, Height=0.8mm, Lead Free=Yes, Manufacturer Part Number=LPS22HBTR, Octopart=https://octopart.com/lps22hbtr-stmicroelectronics-51851131, Port Style="No Port", RoHS=TRUE, Sensor Output=I2C,SPI
U5: library part CMP-12177-000016-1, "CONSUMER MEMS", RoHS Compliant=Yes
U7: library part CMP-12105-000013-1, "ULTRA-LOW-POWER DUAL CORE ARM CO", Ambient Temperature Range High=+85°C, Ambient Temperature Range Low=-40°C, Frequency=64MHz, Manufacturer=STMicroelectronics, Max Junction Temp=+105°C, Max Supply Voltage=3.6V, Min Supply Voltage=1.71V, Package=UFQFPN48, Temperature="-40°C to +105°C", Automotive=No, Category=IC, ComponentLink2Description=Datasheet, ComponentLink2URL=https://www.st.com/resource/en/datasheet/stm32wb55cg.pdf, Core Architecture="ARM Cortex-M4", Data Bus Width=32bits, Device Class L1="Integrated Circuits (ICs)", Device Class L2="Embedded Processors and Controllers", Device Class L3=Microcontrollers, Digikey Description="ULTRA-LOW-POWER DUAL CORE ARM CO", Height=0.65mm, Interface=I2C,SPI,UART,USART,2-Wire,USB,IrDA,Other, Lead Free=Yes, Manufacturer Part Number=STM32WB55CGU6, Memory Size=1MBytes, Memory Type=FLASH, Number Of A/D Converters=1, Number Of Adc Channels=13, Number Of Cores=1, Number Of I2C Channels=2, Number Of I/Os=30, Number Of Pwm Channels=14, Number Of Spi Channels=1, Number Of Timers/Counters=6, Number Of Uart Channels=2, Number Of Usb Channels=1, Octopart=https://octopart.com/stm32wb55cgu6-stmicroelectronics-98750847, Ram Size=256KBytes, RoHS=TRUE, Standoff Height=0mm, Temperature Range High=+105°C, Temperature Range Low=-40°C

## Via types
v1: diameter 23.62, hole 11.81, Top Layer to Bottom Layer, 27 vias

## Nets (pads, with @x,y where several pads share a name; then routed paths per layer and width w, separated by ;. In a path a pad name is that pad's centre, name@x,y a point inside that pad or via, vN(x,y) a via of type N, cw(c..) or ccw(c..) an arc to the next point about the centre after c; other vN are vias at no path point)
+3.3: C3.2 C8.2 C9.2 C10.2 C14.1 C15.2 C16.1 C17.2 C18.1 C19.2 C20.2 C21.1 C22.2 C26.2 D5.1 IC22.H8 IC22.J6 J2.4 L3.1 R9.1 R15.2 R16.2 R19.2 SW1.3 U1.5 U2.1 U2.2 U2.8 U4.1 U4.6 U4.10 U5.1 U5.5 U5.8 U5.12 U7.1 U7.20 U7.23 U7.34 U7.35 U7.40 U7.48 V.2 | length 1852.9
  Top Layer w11.81: C18.1 C19.2 410.88,503.94 462.6,452.22 U7.23 ; C15.2 329.13,102.36 352.29,125.52 352.29,161.29 389.82,198.82 U7.35 ; C21.1 C20.2 350.39,177.17 391.73,218.5 U7.34 ; C22.2 501.97,82.28 U7.40 ; U7.20 521.65,462.2 564.96,505.51 C14.1 ; v1(592.52,53.15) R9.1 593.36,80.71 623.14,50.93 623.14,34.34 J2.4 ; U7.48 659.45,149.61 664.37,149.61 668.5,145.47 C16.1 ; U7.1 847.24,179.13 C26.2 ; R19.2 R19.2@878.12,364.4 ; L3.1 878.54,445.47 878.54,477.76 C17.2 ; R15.2 R16.2 ; C3.2 998.23,35.63 1091.34,35.63 U1.5
  Bottom Layer w11.81: D5.1@74.8,35.43 75.51,36.14 V.2 ; U5.1 341.04,451.77 321.85,451.77 291.34,482.28 291.34,539.37 303.15,551.18 356.3,551.18 367.13,540.35 367.13,517.22 U5.5 369.09,515.26 369.09,498 406.5,460.6 406.5,445.37 U5.12 ; C8.2@343.11,243.11 398.13,243.11 400.1,245.08 410.43,245.08 419.29,253.94 U4.1 ; U2.1 U2.2 ; C10.2 C9.2
  other v1: 1007.87,218.5 944.88,250
GND: B.2 C1.1 C2.1 C3.1 C4.1 C5.2 C6.2 C7.1 C8.1 C9.1 C10.1 C14.2 C15.1 C16.2 C17.1 C18.2 C19.1 C20.1 C21.2 C22.1 C23.2 C24.1 C25.1 C26.1 C27.2 D3.1 D4.2@1118.11,324.8 IC22.C5 IC22.K3 IC22.K8 J2.1 MD1.A2 MD1.B1 MD1.B2 MD1.B3 O1.2 O1.4 Q1.2 R1.2 R2.2 R4.2 R10.1 R11.2 R17.2 SW1.4 SW1.5 U1.2 U2.3 U2.4 U3.6 U3.7 U3.9 U4.3 U4.5 U4.8 U4.9 U5.6 U5.7 U7.22 U7.32 U7.49 USB.A1-B12 USB.B1-A12 USB.GND | length 1230.5
  Top Layer w11.81: C18.2 C19.1 291.04,502.66 291.04,468.8 O1.4 ; C27.2 366.19,248.03 376.03,257.87 U7.32 521.65,257.87 U7.49 ; J2.1 393.7,64.96 409.45,80.71 R10.1 ; v1(438.98,534.45) 438.98,533.46 482.28,490.16 U7.22 ; MD1.A2 MD1.B2 ; v1(511.94,48.83) 511.94,50.35 525.98,64.4 525.98,72.44 532.28,78.74 C22.1 ; MD1.B3 MD1.B2 ; C14.2 559.17,546.73 MD1.B1 MD1.B2 ; C3.1 997.44,71.85 1037.99,71.85 C2.1 ; U1.2 1183.76,71.16 1233.56,71.16 C1.1
  Top Layer w13.78: C24.1@881.89,246.06 C24.1 881.89,245.67 881.89,212.6 C23.2 C26.1 C16.2 ; C25.1@881.89,328.35 C25.1
  Bottom Layer w13.78: Q1.2 358.27,55.12 377.95,74.8 R11.2 ; C8.1 369.68,209.06 374.02,204.72 U4.8 U4.9 ; U2.3 U2.4 ; U5.6 U5.7 407.48,541.34 425.2,559.06 460.43,559.06 468.5,550.98 C9.1@468.5,514.17 ; C10.1 C9.1
  other v1: 944.88,187.01 1102.36,187.01 1039.37,407.48
Net10uh_1: 10uh.1 L2.1 | length 39.8
  Top Layer w11.81: 10uh.1 295.28,212.6 296.26,211.61 L2.1
Net10uh_2: 10uh.2 C27.1 U7.31 | length 189.7
  Top Layer w11.81: 10uh.2@261.42,251.57 10uh.2 C27.1 296.06,248.03 302.36,254.33 302.36,274.8 305.12,277.56 U7.31
NetANT2_1: ANT2.1 MD1.A1 | length 353.8
  Top Layer w11.81: ANT2.1 249.83,539.37 271.88,561.42 487.28,561.42 MD1.A1
NetC2_2: C2.2 U1.4 | length 55.1
  Top Layer w11.81: C2.2 1039.57,108.07 1091.34,108.07 U1.4
NetC5_1: C5.1 U3.5
NetC7_2: C7.2 R3.1 U3.12
NetC23_1: C23.1 O2.1 U7.2 | length 165.1
  Top Layer w11.81: U7.2 783.46,198.82 O2.1@785.43,200.79
  Top Layer w13.78: O2.1 786.52,213.48 846.36,213.48 C23.1
NetC24_2: C24.2 O2.2 U7.3 | length 150.1
  Top Layer w11.81: U7.3 719.94,218.5 759.31,257.87
  Top Layer w13.78: O2.2@803.15,260.83 803.15,259.24 816.52,245.87 C24.2 C24.2@841.73,251.18
NetC25_2: C25.2 D4.2@847.44,399.61 R19.1 U7.7 | length 247.7
  Top Layer w11.81: U7.7 721.37,297.24 749.19,325.06 793.03,325.06 796.51,328.54 C25.2 847.67,328.77 847.67,363.98 847.67,399.61 D4.2@847.44,399.61
NetD1_1: D1.1 U3.3 U7.17
NetD1_2: D1.2 R6.2
NetD2_1: D2.1 U3.4 U7.18
NetD2_2: D2.2 R5.2
NetD3_2: D3.2 R14.2 | length 406.7
  Top Layer w11.81: D3.2 147.64,45.28 233.07,130.71 233.07,262.77 269.52,299.21 R14.2 R14.2@298.63,302.61
NetD4_1: D4.1@1118.11,362.2 U7.37 | length 10.7
  Top Layer w11.81: v1(433.31,156.01) 434.05,155.27 442.91,155.27 U7.37
NetD4_3: D4.3 U7.38 | length 80.8
  Top Layer w11.81: v1(405.25,117.26) 406.1,118.11 439.93,118.11 462.6,140.78 U7.38
NetD4_4: D4.4 USB.A6 | length 81.2
  Top Layer w11.81: D4.4 1209.68,286.38 1289.29,286.38 USB.A6
NetD4_6: D4.6 USB.A7 | length 123.4
  Top Layer w11.81: D4.6 1210.63,360.24 1244.09,360.24 1250,354.33 1250,321.05 1264.78,306.27 1289.29,306.27 USB.A7
NetD5_2: D5.2 Q1.3 V.1 | length 190.4
  Bottom Layer w11.81: V.1 157.48,92.52 Q1.3 253.94,90.55 253.94,49.21 242.13,37.4 212.6,37.4 D5.2@210.63,35.43
NetIC22_C3: IC22.C3 | length 49.2
  Bottom Layer w11.81: IC22.C3 1102.36,456.69
NetIC22_C4: IC22.C4 | length 47.2
  Bottom Layer w11.81: IC22.C4 1070.87,454.72
NetIC22_C6: IC22.C6 | length 51.2
  Bottom Layer w11.81: IC22.C6 1007.87,458.66
NetIC22_C7: IC22.C7 | length 45.3
  Bottom Layer w11.81: IC22.C7 976.38,452.76
NetIC22_C8: IC22.C8 | length 57.1
  Bottom Layer w11.81: 887.8,407.48 IC22.C8
NetIC22_D4: IC22.D4 | length 2
  Bottom Layer w11.81: IC22.D4@1068.9,375.98 v1(1070.87,375.98)
NetIC22_D5: IC22.D5
  other v1: 1039.37,375.98
NetIC22_H4: IC22.H4 U7.9 | length 301.8
  Top Layer w11.81: U7.9 710.63,336.61 740.42,366.4 v1(773.62,366.4) ; v1(913.39,352.36) 968.5,352.36 v1(1070.87,250)
NetIC22_J4: IC22.J4 U7.10 | length 479.1
  Top Layer w11.81: U7.10 705.26,356.3 742.66,393.7 771.74,393.7 v1(773.97,395.93) ; v1(911.36,309.36) 960.33,309.36 1048.92,220.76 1068.61,220.76 v1(1070.87,218.5) v1@1071.85,217.52
  Bottom Layer w11.81: v1(773.97,395.93) 826.51,395.93 911.36,311.08 v1(911.36,309.36)
NetIC22_J7: IC22.J7 U7.14 | length 584.8
  Top Layer w11.81: U7.14 639.76,434.03 703.48,497.74 717.23,497.74 v1(719.49,500) ; v1(910.36,266.33) 910.36,231.38 923.23,218.5 v1(976.38,218.5)
  Bottom Layer w11.81: v1(719.49,500) 750,469.49 750,354.33 840.55,263.78 872.58,263.78 875.13,266.33 v1(910.36,266.33) v1@910.36,266.81
NetIC22_J8: IC22.J8 U7.16 | length 603.6
  Top Layer w11.81: U7.16 600.39,480.32 631.89,511.81 v1(653.54,511.81)
  Bottom Layer w11.81: v1(653.54,511.81) 673.65,511.81 732.28,453.18 732.28,343.06 742.66,332.68 746.06,332.68 860.24,218.5 IC22.J8
NetIC22_K4: IC22.K4 U7.11 | length 1307.1
  Top Layer w11.81: U7.11 697.81,375.98 748.99,427.17 v1(773.62,427.17)
  Bottom Layer w11.81: v1(773.62,427.17) 775.53,427.17 803.15,454.78 803.15,474.8 724.8,553.15 636.42,553.15 595.44,512.17 595.44,288.41 833.03,50.83 976.02,50.83 1070.87,145.67 IC22.K4
NetIC22_K5: IC22.K5 U7.12 | length 1117.1
  Top Layer w11.81: U7.12 688.98,395.67 751.97,458.66 v1(773.62,458.66)
  Bottom Layer w11.81: v1(773.62,458.66) 771.36,460.92 771.36,481.53 717.46,535.43 643.76,535.43 616.14,507.82 616.14,311.31 858.91,68.54 953.83,68.54 1039.37,154.08 IC22.K5
NetIC22_K6: IC22.K6 U7.13 | length 673.4
  Top Layer w11.81: U7.13 659.45,425.2 672.46,438.21 684.27,438.21 v1(686.53,440.47)
  Bottom Layer w11.81: v1(686.53,440.47) 686.53,342.1 696.85,331.78 696.85,328.38 714.57,310.66 714.57,237.94 866.25,86.26 946.5,86.26 1007.87,147.64 IC22.K6
NetIC22_K7: IC22.K7 U7.15 | length 721.8
  Top Layer w11.81: U7.15 620.08,460.21 v1(639.76,479.9)
  Bottom Layer w11.81: v1(639.76,479.9) 642.02,482.16 661.29,482.16 663.39,484.25 676.15,484.25 714.57,445.84 714.57,335.72 734.25,316.03 734.25,243.31 873.59,103.98 921.69,103.98 976.38,158.67 IC22.K7
NetJ2_2: J2.2 R10.2 U7.39 | length 137.1
  Top Layer w11.81: J2.2 469.07,30.93 469.07,77.33 R10.2 466.54,80.71 469.93,84.1 469.93,103.79 482.28,116.14 U7.39
NetJ2_3: J2.3 R9.2 U7.41 | length 158
  Top Layer w11.81: U7.41 521.65,120.08 537.4,104.33 553.15,104.33 561.02,96.46 561.02,82.4 R9.2 562.71,48.68 551.18,37.15 J2.3
NetL2_2: L2.2 U7.33 | length 102
  Top Layer w11.81: L2.2@327.76,210.63 353.84,210.63 381.4,238.19 U7.33
NetL3_2: L3.2 U7.8 | length 260.4
  Top Layer w11.81: U7.8 716,316.93 741.85,342.78 783.41,342.78 789.05,348.43 805.12,348.43 816.93,360.24 816.93,437.01 824.8,444.88 L3.2
NetMD1_A3: MD1.A3 U7.21 | length 80.2
  Top Layer w11.81: U7.21 MD1.A3
NetO1_1: O1.1 U7.25 | length 138.6
  Top Layer w11.81: O1.1 294.29,426.18 324.8,395.67 U7.25
NetO1_3: O1.3 U7.24 | length 132.6
  Top Layer w11.81: O1.3 422.24,467.52 442.91,446.85 U7.24
NetQ1_1: Q1.1 R11.1 R12.1 | length 136.9
  Bottom Layer w11.81: Q1.1 363.12,129.92 374.56,118.48 374.56,108.01 381.35,101.22 387.88,101.22 391.5,97.6 392.15,97.6 411.96,77.79 436.83,77.79 R12.1
NetR1_1: R1.1 U3.15
NetR2_1: R2.1 U3.13
NetR3_2: R3.2 R4.1 U3.8
NetR8_1: R8.1 USB.A5 | length 89.5
  Top Layer w11.81: R8.1@1202.76,241.28 1202.76,242.13 1207.71,247.08 USB.A5
NetR12_2: R12.2 U7.36 | length 140.9
  Top Layer w11.81: v1(376.84,149.61) 379.1,151.87 386.12,151.87 413.39,179.13 U7.36
  Bottom Layer w11.81: v1(376.84,149.61) 376.9,149.55 406.36,149.55 435.58,120.33 435.58,108.85 R12.2
NetR14_1: R14.1 U7.30 | length 87.3
  Top Layer w11.81: R14.1 333.8,297.24 U7.30
NetR15_1: R15.1 U2.6 U4.2 U5.13 U7.46 | length 685.4
  Top Layer w11.81: U7.46 620.08,135.41 680.88,74.61 R15.1
  Bottom Layer w11.81: U5.13 388.78,443.41 388.78,428.18 409.48,407.48 509.84,407.48 523.62,393.7 523.62,368.11 517.66,362.15 U2.6 460.58,361.16 442.9,361.16 407.48,325.74 407.48,309.06 438.98,277.56 U4.2
NetR16_1: R16.1 U2.5 U4.4 U5.14 U7.47 | length 716.4
  Top Layer w11.81: U7.47 639.76,140.78 668.53,112.01 R16.1
  Bottom Layer w11.81: U5.14 368.11,422.27 361.19,415.35 299.21,415.35 265.75,381.89 265.75,318.9 295.28,289.37 378.91,289.37 385.83,296.29 385.83,329.14 437.55,380.86 460.58,380.86 U2.5 U2.5@452.71,381.85
NetR17_1: R17.1 SW1.2 U7.4 | length 220.5
  Top Layer w11.81: U7.4 714.57,238.19 740.16,263.78 740.16,289.34 740.35,289.54 740.35,291.17 756.53,307.35 822.57,307.35 845.03,284.89 845.87,284.89 R17.1
NetU2_7: U2.7
NetU3_14: U3.14
NetU7_5: U7.5
NetU7_6: U7.6
NetU7_19: U7.19
NetU7_28: U7.28
NetU7_29: U7.29
NetU7_42: U7.42
NetU7_43: U7.43
NetU7_44: U7.44
NetU7_45: U7.45
VBAT: B.1 C1.2 C4.2 U1.1 U1.3 U3.10 U3.11 | length 209.5
  Top Layer w11.81: U1.3 1144.69,109.25 1135.83,100.39 1135.83,45.28 1146.65,34.45 U1.1 1183.76,35.14 1233.56,35.14 C1.2
VUSB: C6.1 D4.5 R5.1 R6.1 R8.2 U3.1 U3.2 USB.A4-B9 USB.B4-A9 | length 468.4
  Top Layer w11.81: R8.2@1202.76,211.47 1238.17,211.47 1247.87,201.78 USB.A4-B9 ; R8.2 1174.35,213.44 1163.39,224.41 1163.39,316.93 1171.26,324.8 ; D4.5 1171.26,324.8 ; USB.B4-A9 1170.3,390.78 1161.42,381.89 1161.42,336.61 1171.26,326.77 1171.26,324.8
pads on no net: ANT2.2 D4.1@900.59,399.61 IC22.A1 IC22.A2 IC22.A9 IC22.A10 IC22.B1 IC22.B9 IC22.B10 IC22.D3 IC22.D6 IC22.D7 IC22.D8 IC22.E3 IC22.E4 IC22.E5 IC22.E6 IC22.E7 IC22.E8 IC22.F3 IC22.F4 IC22.F5 IC22.F6 IC22.F7 IC22.F8 IC22.G3 IC22.G4 IC22.G5 IC22.G6 IC22.G7 IC22.G8 IC22.H3 IC22.H5 IC22.H6 IC22.H7 IC22.J3 IC22.J5 IC22.L1 IC22.L2 IC22.L9 IC22.L10 IC22.M1 IC22.M2 IC22.M9 IC22.M10 J2.5 SW1. SW1.1 U3.16 U3.17 U4.7 U5.2 U5.3 U5.4 U5.9 U5.10 U5.11 U7.26 U7.27 USB.A8 USB.B5 USB.B6 USB.B7 USB.B8

## Polygon pours and split planes (outlines as drawn)
GND on Sub Top Layer "GND_L02_P000" (solid, pour order 0): 0,590.55 0,0 1574.8,0 1574.8,590.55
+3.3 on Sub Bottom Layer "+3.3_L03_P003" (solid, pour order 3): 0,590.55 1574.8,590.55 1574.8,0 0,0

## Silkscreen, mask and mechanical layers (free items; w line width, h text height)
Top Overlay:
  lines w10: 0,0 1574.8,0 1574.8,590.55 0,590.55 ; 423.23,748.03 1013.78,748.03

## Text inside footprints (layer, text, board x,y; h text height)
D5: Mechanical 13 "*" at 79.22,61.4 h50 r180; Bottom Overlay "*" at 20.54,61.4 h50 r180
USB: Top Overlay "*" at 1314.38,57.78 h50 r90; Mechanical 13 "*" at 1314.38,57.78 h50 r90